# EAGLE board board_atmega (EAGLE 9.6.2)
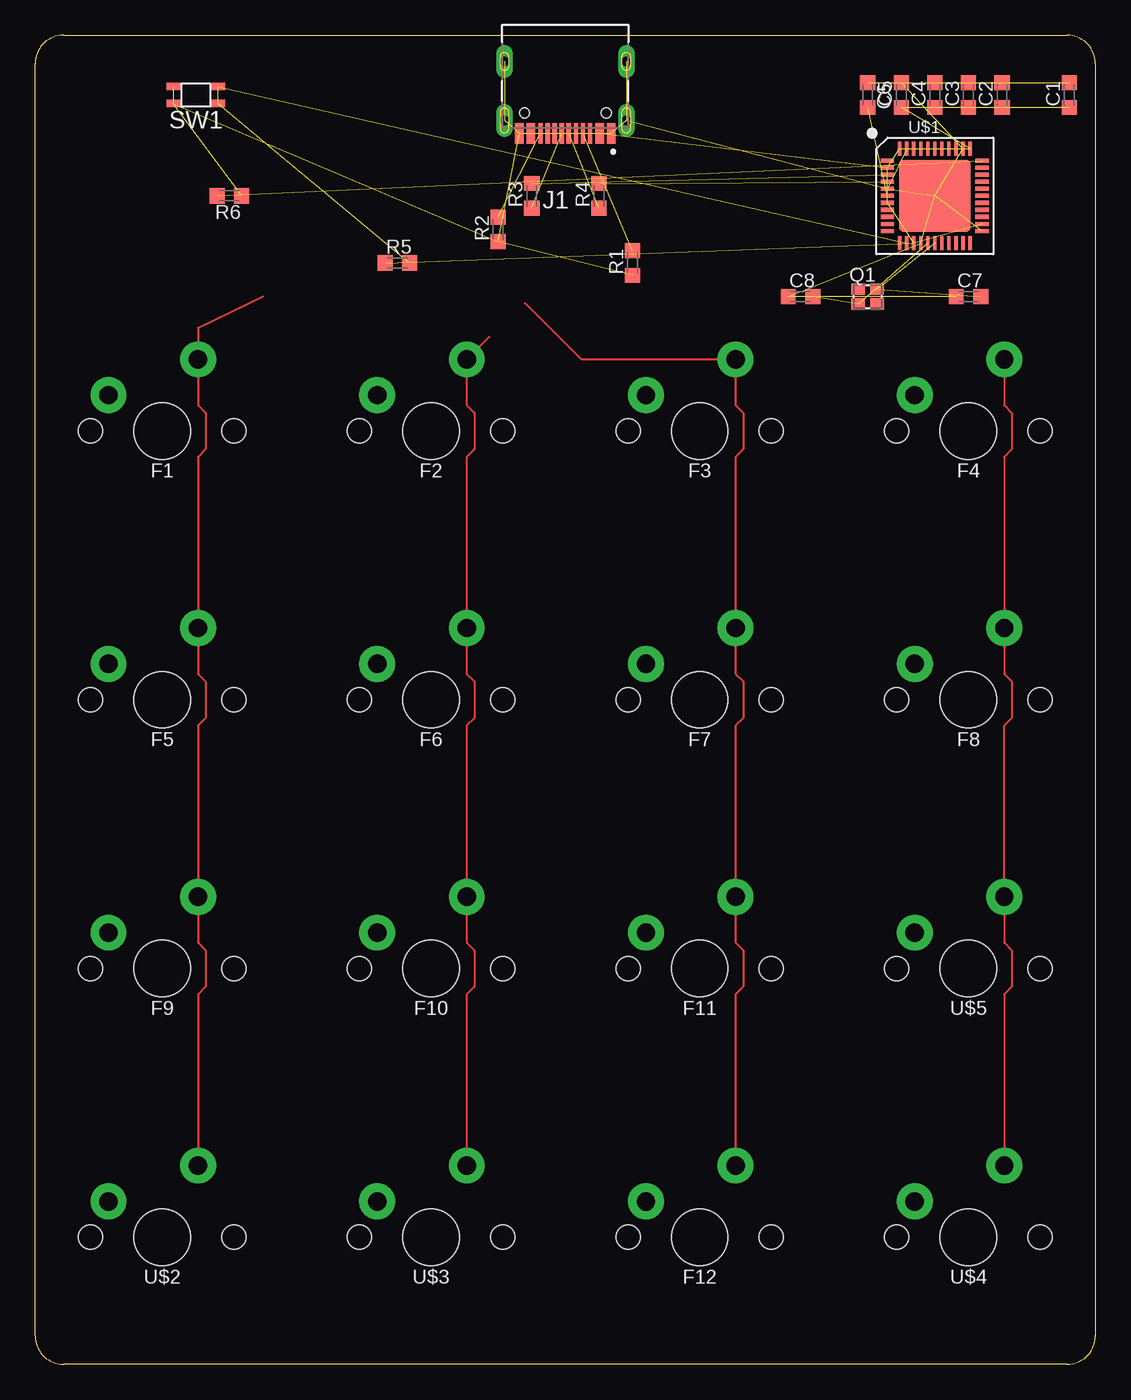
[diagram p0: board, top side]
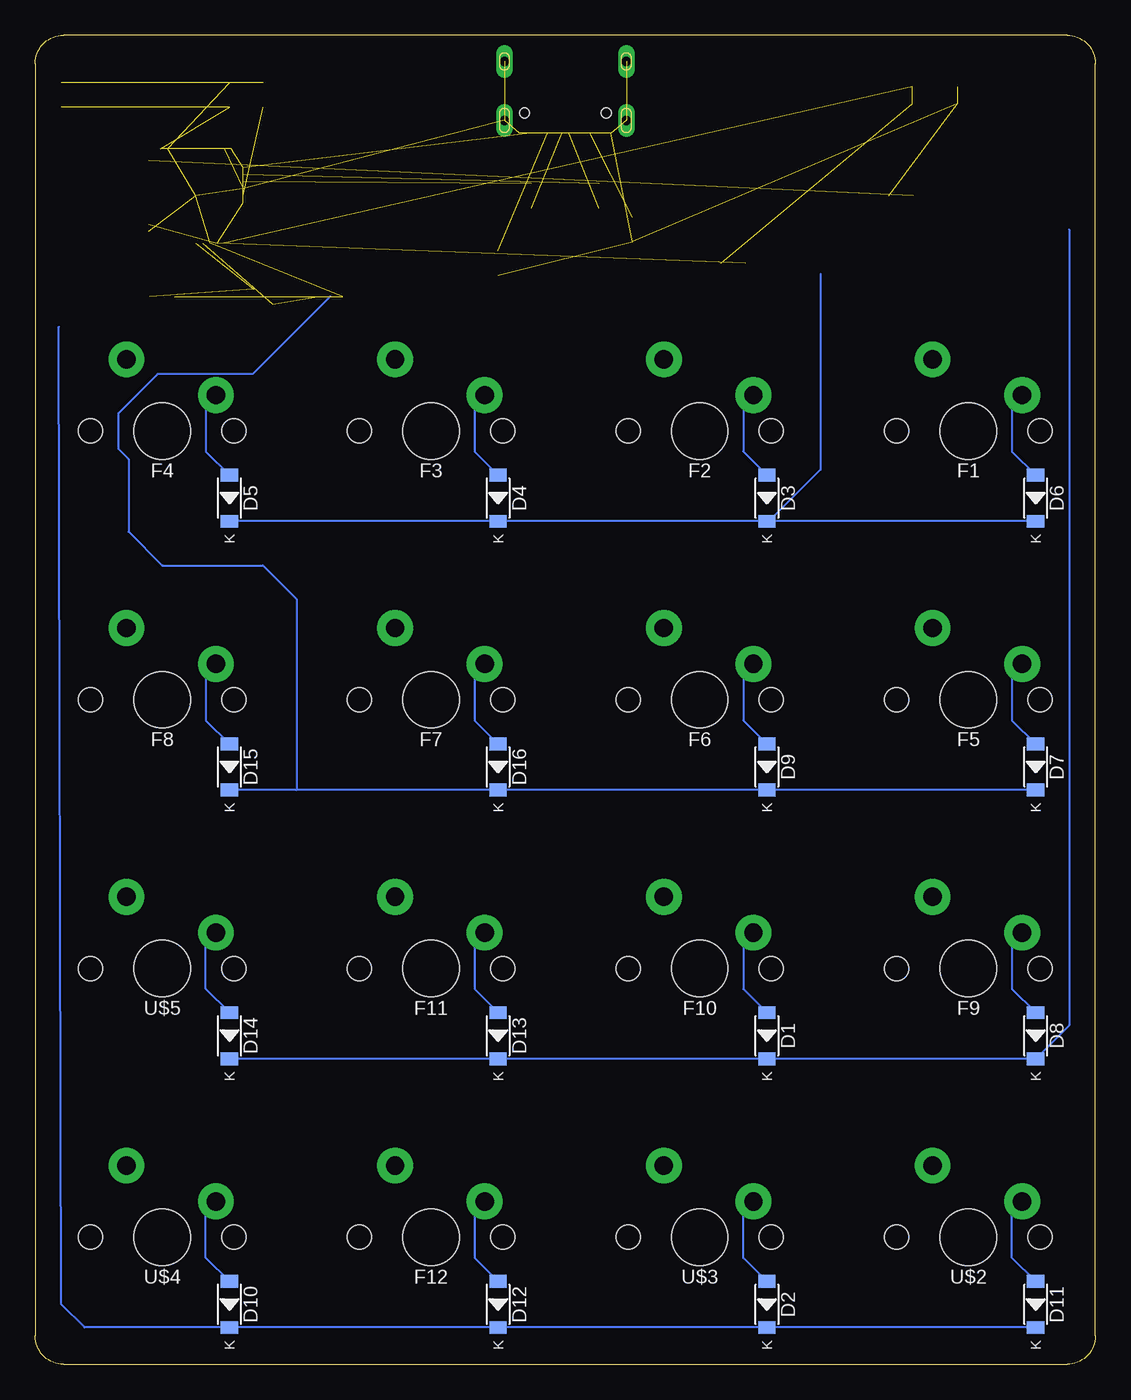
[diagram p1: board, bottom side, seen from below]

Size 75.15 x 94.2 mm. Coordinates in mm from the lower left corner, seen from the top.
Outline: 75.15,92.2 75.15,2 arc-90 73.15,0 2,0 arc-90 0,2 0,92.2 arc-90 2,94.2 73.15,94.2 arc-90 75.15,92.2
Copper layers (1*16): Top 0.035mm / dielectric 1.5mm / Bottom 0.035mm
Design rules "default": minimum track width 6mil, minimum drill 0.35mm, track to track 6mil, track to pad 6mil, pad to pad 6mil, via to via 6mil, smd to smd 6mil, copper to edge 40mil, drill to drill 6mil, minimum pad ring 10mil, minimum via ring 8mil, stop-mask expansion 4mil, vias tented up to drill 0mil, thermal gap 10mil

## Footprints (pad centres in the part's own frame; a part is rotated, then mirrored left to right if it is on the bottom)
C0603 = smd 1.05 x 1.08: 1 -0.875,0; 2 0.875,0
SOD-123 = smd 0.91 x 1.22: A -1.635,0; C 1.635,0
MX-1U = drill 1.3 pad 2.54: MX1 -3.81,2.54; MX2 2.54,5.08 | hole 4: 0,0 | hole 1.7: -5.08,0; 5.08,0
HRO_TYPE-C-31-M-12 = smd 0.6 x 1.45: A1B12 -3.25,5.095; A4B9 -2.45,5.095; B1A12 3.25,5.095; B4A9 2.45,5.095 | smd 0.3 x 1.45: A5 -1.25,5.095; A6 -0.25,5.095; A7 0.25,5.095; A8 1.25,5.095; B5 1.75,5.095; B6 0.75,5.095; B7 -0.75,5.095; B8 -1.75,5.095 | drill 0.65 pad 1.05 long: S1 -4.32,4.18; S2 4.32,4.18; S3 -4.32,0; S4 4.32,0 | hole 0.7: -2.89,3.65; 2.89,3.65
2.0X1.6_KX-5 = smd 0.95 x 0.8: 1 -0.675,-0.525; 2 0.675,-0.525; 3 0.675,0.525; 4 -0.675,0.525
R0603 = smd 1.05 x 1.08: 1 -0.875,0; 2 0.875,0
SWITCH-SMD-EVP-BB2A9B00 = smd 0.95 x 0.55: A@1 -1.6,0.6; A@2 -1.6,-0.6; B@3 1.6,0.6; B@4 1.6,-0.6
QFN-44 = smd 1 x 0.3: 1 -3.35,2.5; 2 -3.35,2; 3 -3.35,1.5; 4 -3.35,1; 5 -3.35,0.5; 6 -3.35,0; 7 -3.35,-0.5; 8 -3.35,-1; 9 -3.35,-1.5; 10 -3.35,-2; 11 -3.35,-2.5; 23 3.35,-2.5; 24 3.35,-2; 25 3.35,-1.5; 26 3.35,-1; 27 3.35,-0.5; 28 3.35,0; 29 3.35,0.5; 30 3.35,1; 31 3.35,1.5; 32 3.35,2; 33 3.35,2.5 | smd 0.3 x 1: 12 -2.5,-3.35; 13 -2,-3.35; 14 -1.5,-3.35; 15 -1,-3.35; 16 -0.5,-3.35; 17 0,-3.35; 18 0.5,-3.35; 19 1,-3.35; 20 1.5,-3.35; 21 2,-3.35; 22 2.5,-3.35; 34 2.5,3.35; 35 2,3.35; 36 1.5,3.35; 37 1,3.35; 38 0.5,3.35; 39 0,3.35; 40 -0.5,3.35; 41 -1,3.35; 42 -1.5,3.35; 43 -2,3.35; 44 -2.5,3.35 | smd 5.08 x 5.08: TAB 0,0

## Placement (x,y rotation side)
C1  0.1uF  [C0603]  73.29,89.96 90 top
C2  0.1uF  [C0603]  68.53,89.96 90 top
C3  0.1uF  [C0603]  66.15,89.96 90 top
C4  0.1uF  [C0603]  63.77,89.96 90 top
C5  10uF  [C0603]  61.39,89.96 90 top
C6  1uF  [C0603]  59.01,89.96 270 top
C7  22uF  [C0603]  66.15,75.68 0 top
C8  22uF  [C0603]  54.24,75.68 0 top
D1  [SOD-123]  23.29,23.29 270 bottom
D2  [SOD-123]  23.29,4.24 270 bottom
D3  [SOD-123]  23.29,61.39 270 bottom
D4  [SOD-123]  42.34,61.39 270 bottom
D5  [SOD-123]  61.39,61.39 270 bottom
D6  [SOD-123]  4.24,61.39 270 bottom
D7  [SOD-123]  4.24,42.34 270 bottom
D8  [SOD-123]  4.24,23.29 270 bottom
D9  [SOD-123]  23.29,42.34 270 bottom
D10  [SOD-123]  61.39,4.24 270 bottom
D11  [SOD-123]  4.24,4.24 270 bottom
D12  [SOD-123]  42.34,4.24 270 bottom
D13  [SOD-123]  42.34,23.29 270 bottom
D14  [SOD-123]  61.39,23.29 270 bottom
D15  [SOD-123]  61.39,42.34 270 bottom
D16  [SOD-123]  42.34,42.34 270 bottom
F1  KEYSWITCH-PLAIN-MX-1U  [MX-1U]  9,66.15 0 top
F2  KEYSWITCH-PLAIN-MX-1U  [MX-1U]  28.05,66.15 0 top
F3  KEYSWITCH-PLAIN-MX-1U  [MX-1U]  47.1,66.15 0 top
F4  KEYSWITCH-PLAIN-MX-1U  [MX-1U]  66.15,66.15 0 top
F5  KEYSWITCH-PLAIN-MX-1U  [MX-1U]  9,47.1 0 top
F6  KEYSWITCH-PLAIN-MX-1U  [MX-1U]  28.05,47.1 0 top
F7  KEYSWITCH-PLAIN-MX-1U  [MX-1U]  47.1,47.1 0 top
F8  KEYSWITCH-PLAIN-MX-1U  [MX-1U]  66.15,47.1 0 top
F9  KEYSWITCH-PLAIN-MX-1U  [MX-1U]  9,28.05 0 top
F10  KEYSWITCH-PLAIN-MX-1U  [MX-1U]  28.05,28.05 0 top
F11  KEYSWITCH-PLAIN-MX-1U  [MX-1U]  47.1,28.05 0 top
F12  KEYSWITCH-PLAIN-MX-1U  [MX-1U]  47.1,9 0 top
J1  TYPE-C-31-M-12  [HRO_TYPE-C-31-M-12]  37.58,92.34 180 top
Q1  16Mhz  [2.0X1.6_KX-5]  59.01,75.68 0 top
R1  5.1k  [R0603]  42.34,78.06 90 top
R2  5.1k  [R0603]  32.81,80.44 90 top
R3  22  [R0603]  35.19,82.82 90 top
R4  22  [R0603]  39.96,82.82 90 top
R5  10k  [R0603]  25.67,78.06 0 top
R6  10k  [R0603]  13.76,82.82 180 top
SW1  SWITCH-SMD-EVP-BB2A9B00  [SWITCH-SMD-EVP-BB2A9B00]  11.38,89.96 0 top
U$1  ATMEGA32U4-QFN44  [QFN-44]  63.77,82.82 0 top
U$2  KEYSWITCH-PLAIN-MX-1U  [MX-1U]  9,9 0 top
U$3  KEYSWITCH-PLAIN-MX-1U  [MX-1U]  28.05,9 0 top
U$4  KEYSWITCH-PLAIN-MX-1U  [MX-1U]  66.15,9 0 top
U$5  KEYSWITCH-PLAIN-MX-1U  [MX-1U]  66.15,28.05 0 top

## Library data of the parts
C1-C8 D1-D16 R1-R6 = Components
F1-F12 U$2-U$5 = Keyboard
J1 = TYPE-C-31-M-12; AVAILABILITY: Unavailable; DESCRIPTION: USB Connectors 24 Receptacle 1 8.94*7.3mm RoHS; MF: HRO Electronics Co., Ltd.; MP: TYPE-C-31-M-12; PACKAGE: Package; PRICE: None
Q1 = crystal-geyer_V1_0
SW1 U$1 = Controller

## Nets
0: C1.2 C2.2 C3.2 C4.2 C5.2 C6.1 C7.1 C8.1 J1.A1B12 J1.B1A12 J1.S1 J1.S2 J1.S3 J1.S4 R1.1 R2.1 R6.1 SW1.A@1 SW1.A@2 U$1.5 U$1.15 U$1.23 U$1.35 U$1.43 U$1.TAB
C0: F1.MX2 F5.MX2 F9.MX2 U$2.MX2
C1: F2.MX2 F6.MX2 F10.MX2 U$3.MX2
C2: F3.MX2 F7.MX2 F11.MX2 F12.MX2
C3: F4.MX2 F8.MX2 U$4.MX2 U$5.MX2
D+: J1.A6 J1.B6 R4.1
D-: J1.A7 J1.B7 R3.1
N$1: D6.A F1.MX1
N$2: D3.A F2.MX1
N$3: D4.A F3.MX1
N$4: D5.A F4.MX1
N$5: D7.A F5.MX1
N$6: D9.A F6.MX1
N$7: D16.A F7.MX1
N$8: D8.A F9.MX1
N$9: D1.A F10.MX1
N$10: D13.A F11.MX1
N$11: D12.A F12.MX1
N$12: D11.A U$2.MX1
N$13: D14.A U$5.MX1
N$14: D15.A F8.MX1
N$15: J1.B5 R2.2
N$16: J1.A5 R1.2
N$17: R6.2 U$1.33
N$18: C6.2 U$1.6
N$19: C7.2 Q1.3 U$1.17
N$20: R3.2 U$1.3
N$21: R4.2 U$1.4
N$22: C8.2 Q1.1 U$1.16
N$23: D10.A U$4.MX1
N$24: R5.2 SW1.B@3 SW1.B@4 U$1.13
N$25: D2.A U$3.MX1
R0: D3.C D4.C D5.C D6.C
R1: D7.C D9.C D15.C D16.C
R2: D1.C D8.C D13.C D14.C
R3: D2.C D10.C D11.C D12.C
VCC: C1.1 C2.1 C3.1 C4.1 C5.1 J1.A4B9 J1.B4A9 R5.1 U$1.2 U$1.7 U$1.14 U$1.24 U$1.34 U$1.44

## Tracks (layer width: path | path; a pad name or v marks a point on that pad's centre or on a via)
0  (24 unrouted)
C0
  Top 0.152: 16.14,75.67 11.54,73.45 F1.MX2 11.54,67.98 12.09,67.43 12.09,64.87 11.54,64.32 F5.MX2 11.54,48.93 12.09,48.38 12.09,45.82 11.54,45.27 F9.MX2 11.54,29.88 12.09,29.33 12.09,26.77 11.54,26.22 U$2.MX2
C1
  Top 0.152: 32.18,72.82 F2.MX2 30.59,67.98 31.14,67.43 31.14,64.87 30.59,64.32 F6.MX2 30.59,48.93 31.14,48.38 31.14,45.82 30.59,45.27 F10.MX2 30.59,29.88 31.14,29.33 31.14,26.77 30.59,26.22 U$3.MX2
C2
  Top 0.152: F12.MX2 49.64,26.22 50.19,26.77 50.19,29.33 49.64,29.88 F11.MX2 49.64,45.27 50.19,45.82 50.19,48.38 49.64,48.93 F7.MX2 49.64,64.32 50.19,64.87 50.19,67.43 49.64,67.98 F3.MX2 38.69,71.23 34.72,75.2
C3
  Top 0.152: F4.MX2 68.69,67.98 69.24,67.43 69.24,64.87 68.69,64.32 F8.MX2 68.69,48.93 69.24,48.38 69.24,45.82 68.69,45.27 U$5.MX2 68.69,29.88 69.24,29.33 69.24,26.77 68.69,26.22 U$4.MX2
D+  (2 unrouted)
D-  (2 unrouted)
N$1
  Bottom 0.152: D6.A 5.91,64.69 5.91,67.97 F1.MX1
N$2
  Bottom 0.152: D3.A 24.96,64.69 24.96,67.97 F2.MX1
N$3
  Bottom 0.152: D4.A 44.01,64.69 44.01,67.97 F3.MX1
N$4
  Bottom 0.152: D5.A 63.06,64.69 63.06,67.97 F4.MX1
N$5
  Bottom 0.152: D7.A 5.91,45.64 5.91,48.92 F5.MX1
N$6
  Bottom 0.152: D9.A 24.96,45.64 24.96,48.92 F6.MX1
N$7
  Bottom 0.152: D16.A 44.01,45.64 44.01,48.92 F7.MX1
N$8
  Bottom 0.152: F9.MX1 5.91,29.87 5.91,26.59 D8.A
N$9
  Bottom 0.152: D1.A 24.96,26.59 24.96,29.87 F10.MX1
N$10
  Bottom 0.152: D13.A 44.01,26.59 44.01,29.87 F11.MX1
N$11
  Bottom 0.152: D12.A 44.01,7.54 44.01,10.82 F12.MX1
N$12
  Bottom 0.152: D11.A 5.91,7.54 5.91,10.82 U$2.MX1
N$13
  Bottom 0.152: D14.A 63.06,26.59 63.06,29.87 U$5.MX1
N$14
  Bottom 0.152: D15.A 63.06,45.64 63.06,48.92 F8.MX1
N$15  (1 unrouted)
N$16  (1 unrouted)
N$17  (1 unrouted)
N$18  (1 unrouted)
N$19  (2 unrouted)
N$20  (1 unrouted)
N$21  (1 unrouted)
N$22  (2 unrouted)
N$23
  Bottom 0.152: D10.A 63.06,7.54 63.06,10.82 U$4.MX1
N$24  (3 unrouted)
N$25
  Bottom 0.152: D2.A 24.96,7.54 24.96,10.82 U$3.MX1
R0
  Bottom 0.152: D6.C D3.C | D3.C D4.C D5.C | 19.48,77.29 19.48,63.41 23.13,59.75 D3.C
R1
  Bottom 0.152: D7.C D9.C D16.C 56.62,40.7 | 56.62,40.7 D15.C | 56.62,40.7 56.62,54.24 59.01,56.62 66.15,56.62 68.53,59.01 68.53,64.16 69.24,64.87 69.24,67.43 66.48,70.19 59.73,70.19 54.24,75.67
R2
  Bottom 0.152: D14.C D13.C D1.C D8.C 1.86,24.03 1.86,80.44
R3
  Bottom 0.152: 73.48,73.54 73.29,4.24 71.66,2.6 D10.C D12.C D2.C D11.C
VCC  (13 unrouted)